# Altium PCB LED plane.PcbDoc
Units mm, origin at the board's own origin, x right, y up, seen from the top; angles counter-clockwise.
Board outline 72 x 72 mm, 2 copper layers (Top Layer, Bottom Layer); 38 components, 37 nets, 79 pads, 0 vias.
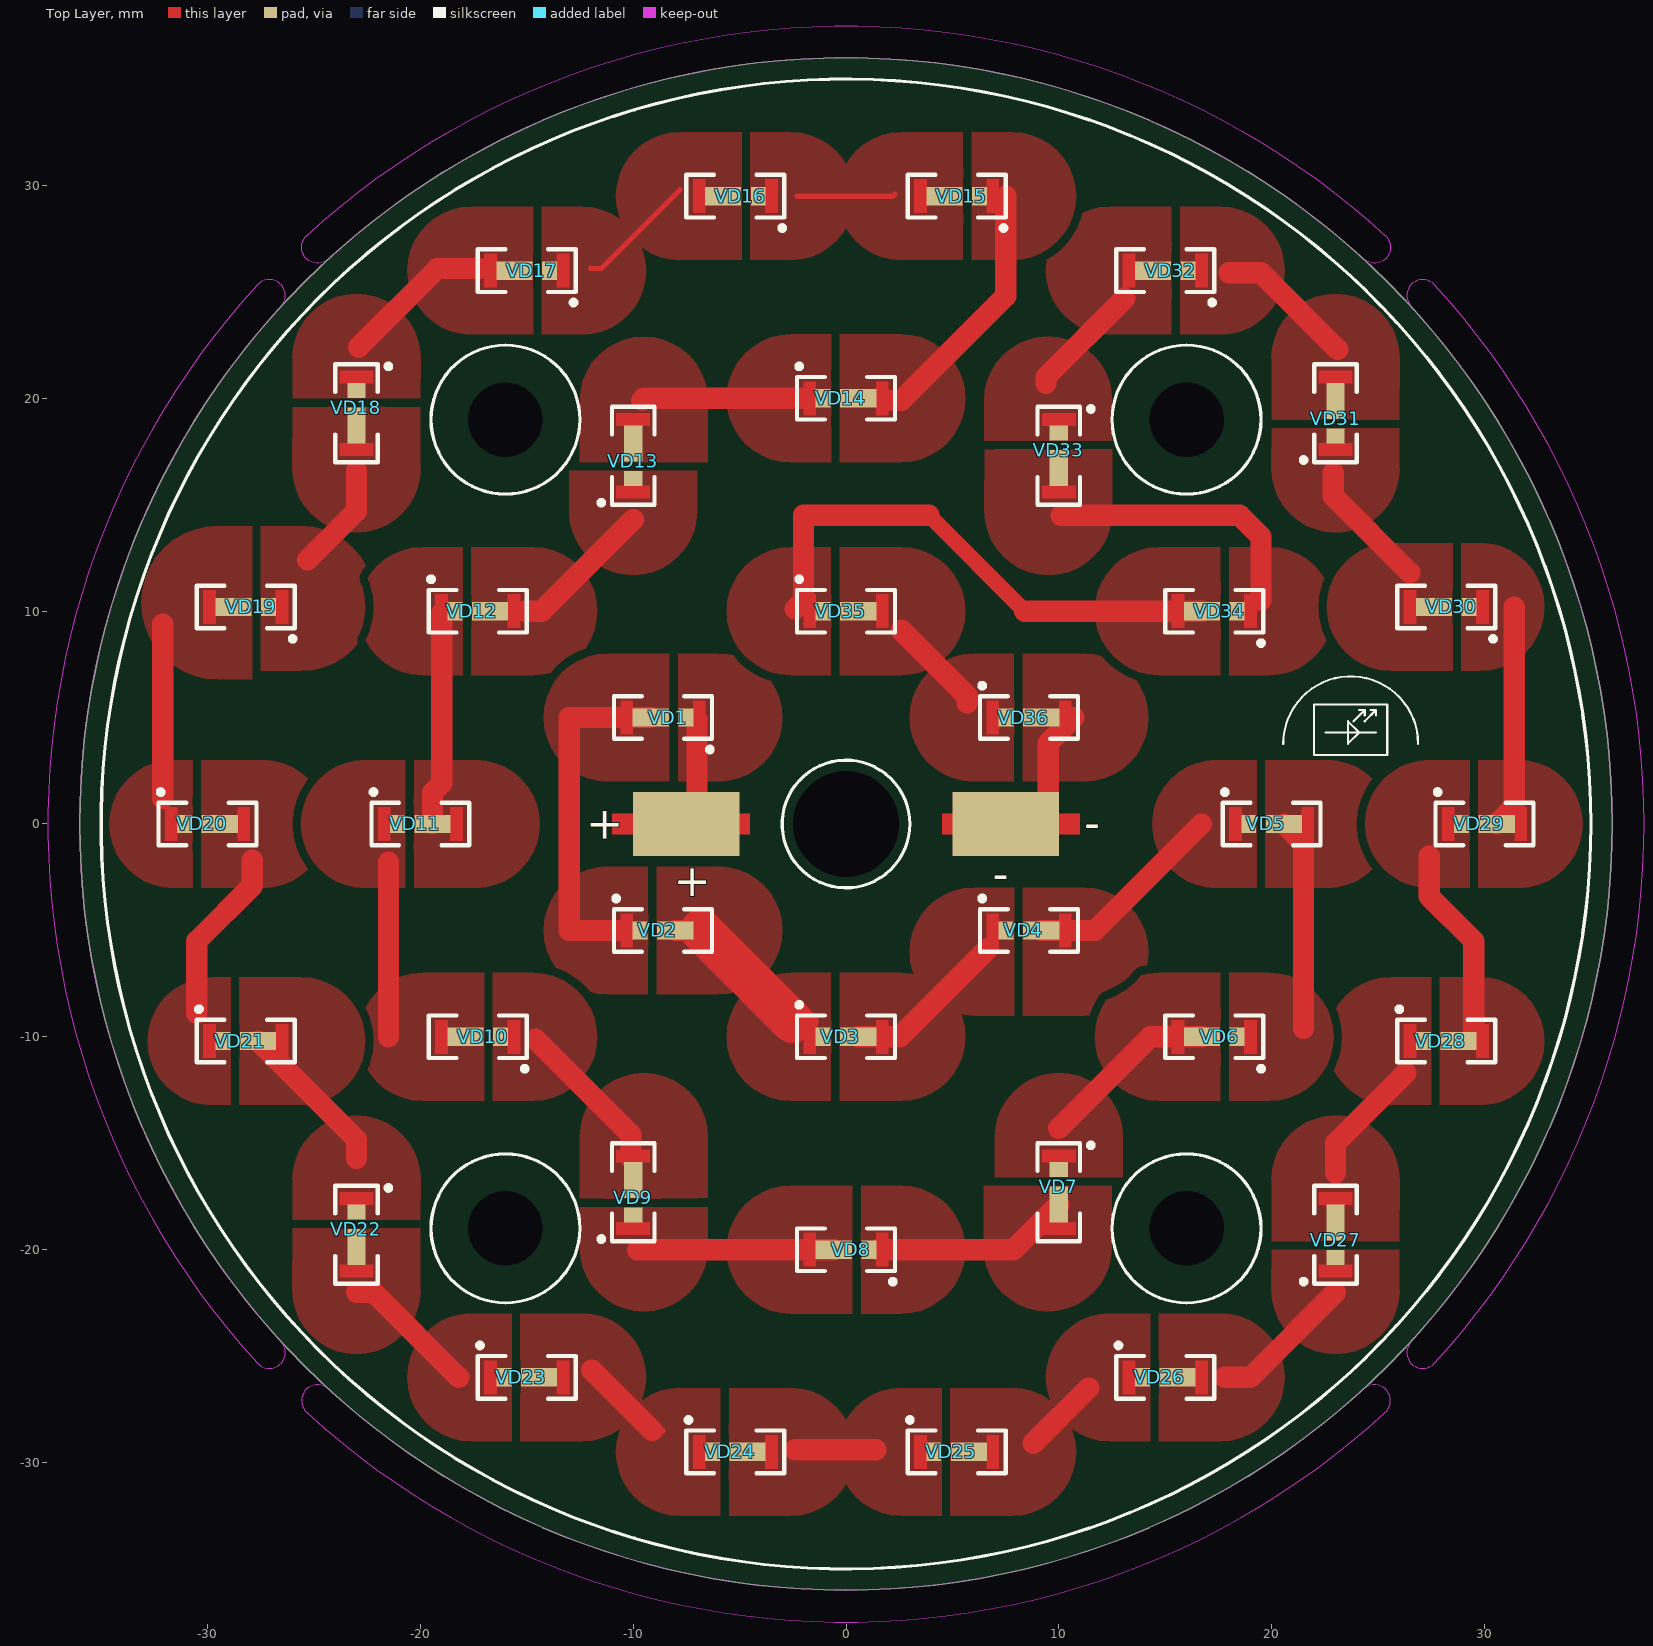
[diagram p0: Top Layer view]
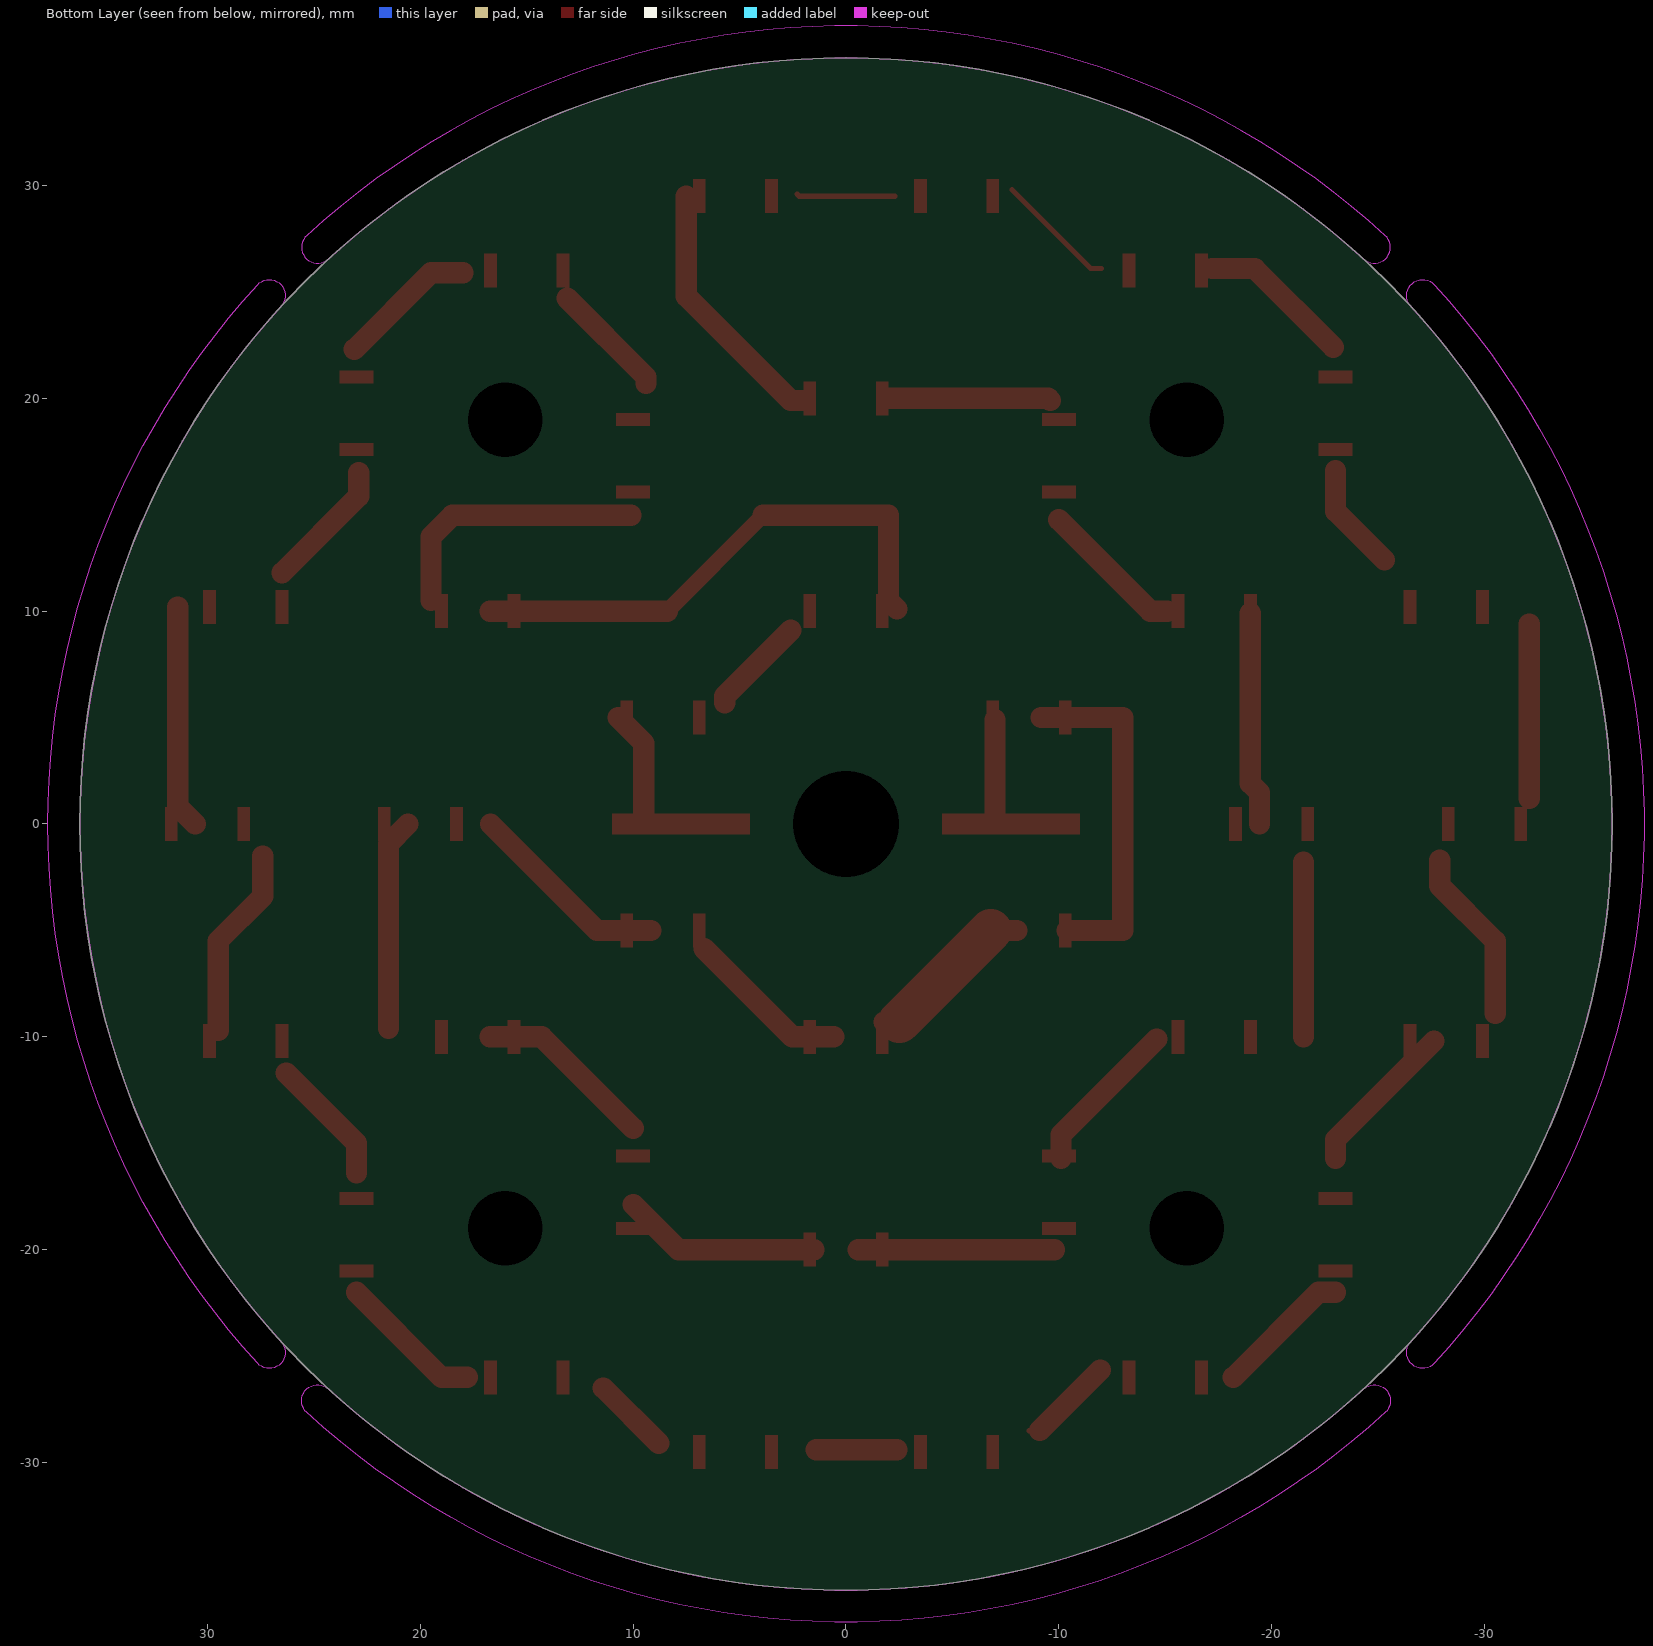
[diagram p1: Bottom Layer view, seen from below]
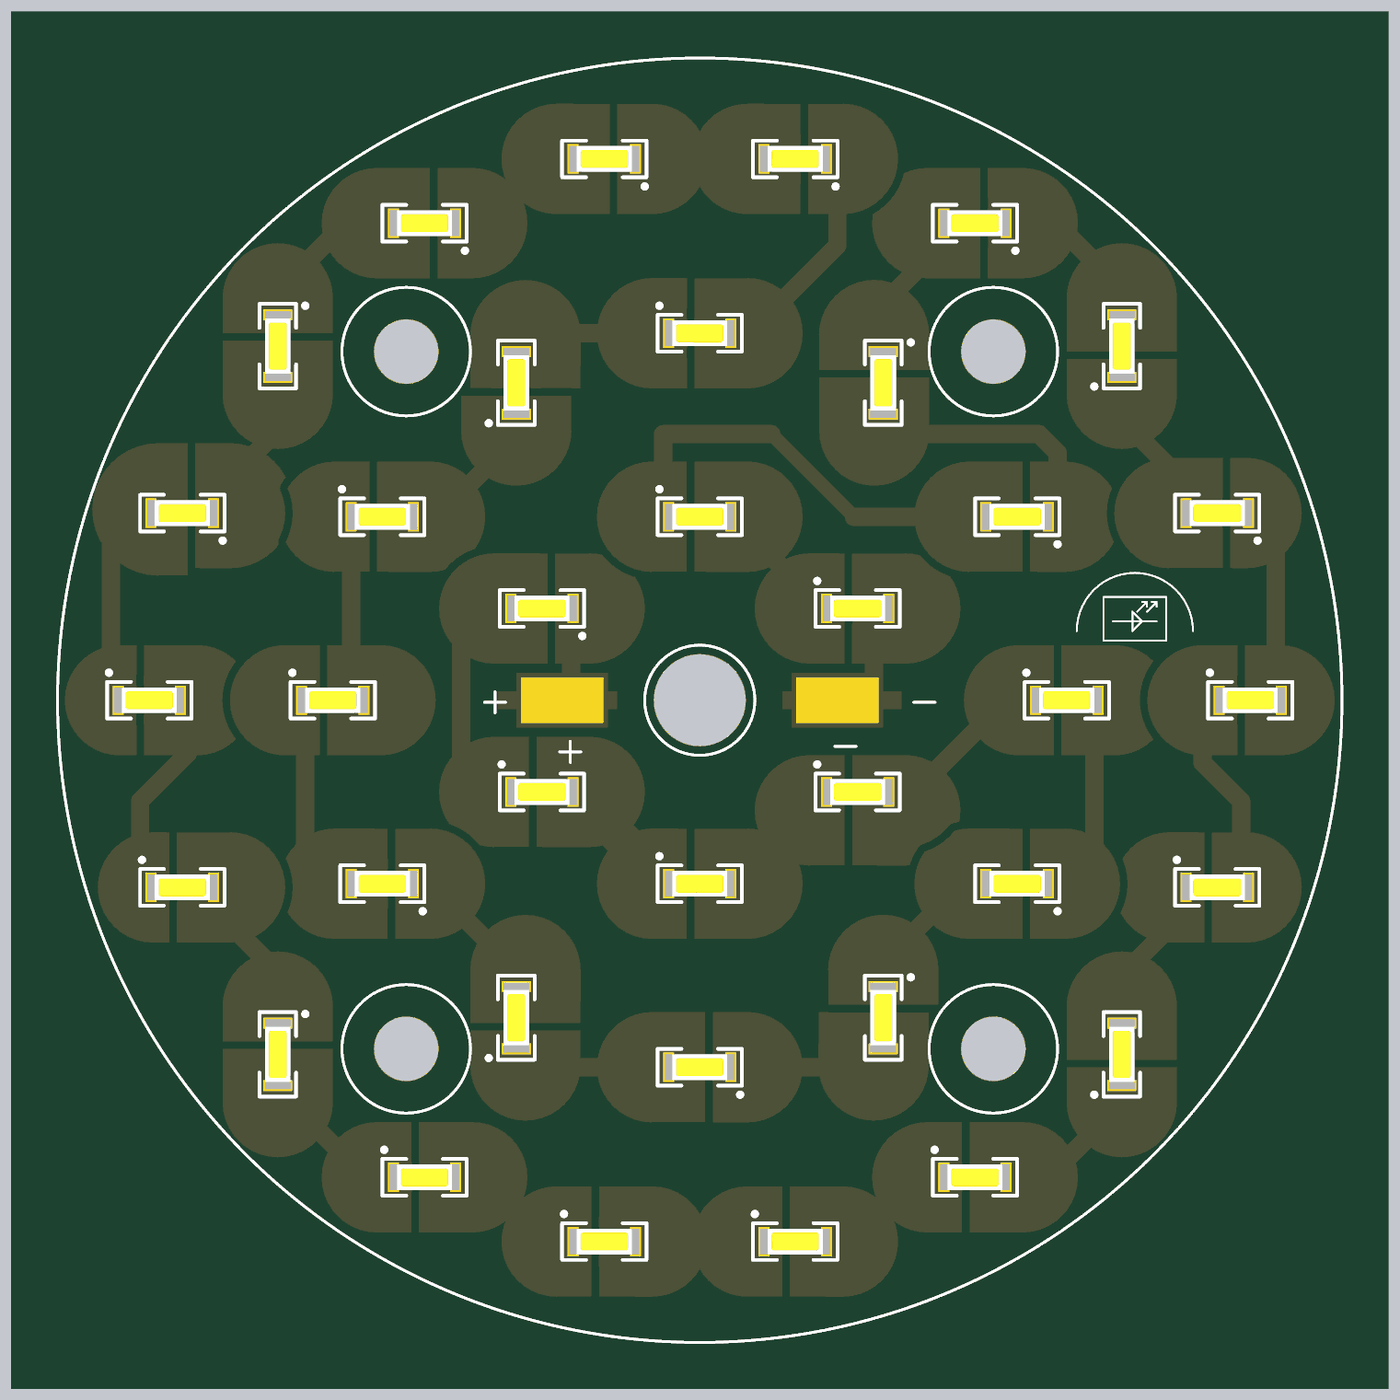
[diagram p2: 3D render of the assembled board from above, using the file's embedded part models]

## Layer stack, top to bottom
Top Layer: signal copper 0.0356
Dielectric: dielectric 0.32, FR-4, Dk 4.8
Bottom Layer: signal copper 0.0356

## Board outline
-36,0 ccw(c0,0) 0,-36 ccw(c0,0) 36,0 ccw(c0,0) 0,36 ccw(c0,0)
cut-out: 26.542,-24.321 ccw(c27.095,-24.828) 27.648,-25.335 ccw(c0,0) 37.5,0 ccw(c0,0) 27.648,25.335 ccw(c27.095,24.828) 26.542,24.321 cw(c0,0) 36,0 cw(c0,0)
cut-out: -24.321,26.542 cw(c-24.828,27.095) -25.335,27.648 cw(c0,0) 25.335,27.648 cw(c24.828,27.095) 25.578,27.095 cw(c24.828,27.095) 24.321,26.542 ccw(c0,0)
cut-out: -27.648,-25.335 ccw(c-27.095,-24.828) -26.345,-24.828 ccw(c-27.095,-24.828) -26.542,-24.321 cw(c0,0) -26.542,24.321 ccw(c-27.095,24.828) -26.345,24.828 ccw(c-27.095,24.828) -27.648,25.335 ccw(c0,0)
cut-out: -25.335,-27.648 ccw(c0,0) 25.335,-27.648 ccw(c24.828,-27.095) 25.578,-27.095 ccw(c24.828,-27.095) 24.321,-26.542 cw(c0,0) -24.321,-26.542 ccw(c-24.828,-27.095)

## Design rules (kind name [scope] priority, off if disabled: settings)
Clearance [All] p1: gap=0.4
HoleSize [All] p1: absolutevalues=TRUE maxlimit=5 minlimit=0.025 maxpercent=80.000 minpercent=20.000
PasteMaskExpansion [All] p1: expansion=0.1
PlaneClearance [All] p1: clearance=1
PlaneConnect [All] p1: planeconnectstyle=Relief reliefexpansion=0.508 reliefentries=4 reliefconductorwidth=1 reliefairgap=0.1
PolygonConnect [All] p1: connectstyle=Direct reliefconductorwidth=0.254 reliefentries=4 polygonreliefangle="90 Angle" airgapwidth=0.254
RoutingVias [All] p1: holewidth=0.711 width=1.27 viastyle="Through Hole" minholewidth=0.711 minwidth=1.27 maxholewidth=0.711 maxwidth=1.27
SilkscreenOverComponentPads SilkToSolderMaskClearance [IsPad] p1: minsilkscreentomaskgap=0.254
SolderMaskExpansion [All] p1: expansion=0.1
Width [All] p1: maxlimit=2 minlimit=0.254 preferedwidth=0.254
23 further rules are at their usual default settings.

## Components (designator, comment, footprint, x,y, rotation, side; value= is the part's Value field where it differs from the comment)
+ "Pad" PAD -7.5,0 r0 top
- "Pad" PAD 7.5,0 r0 top
VD1 "LED" "NICHIA 157" -8.6,5 r180 top
VD2 "LED" "NICHIA 157" -8.6,-5 r0 top
VD3 "LED" "NICHIA 157" 0,-10 r0 top
VD4 "LED" "NICHIA 157" 8.6,-5 r0 top
VD5 "LED" "NICHIA 157" 20,0 r0 top
VD6 "LED" "NICHIA 157" 17.3,-10 r180 top
VD7 "LED" "NICHIA 157" 10,-17.3 r270 top
VD8 "LED" "NICHIA 157" 0,-20 r180 top
VD9 "LED" "NICHIA 157" -10,-17.3 r90 top
VD10 "LED" "NICHIA 157" -17.3,-10 r180 top
VD11 "LED" "NICHIA 157" -20,0 r0 top
VD12 "LED" "NICHIA 157" -17.3,10 r0 top
VD13 "LED" "NICHIA 157" -10,17.3 r90 top
VD14 "LED" "NICHIA 157" 0,20 r0 top
VD15 "LED" "NICHIA 157" 5.2,29.5 r180 top
VD16 "LED" "NICHIA 157" -5.2,29.5 r180 top
VD17 "LED" "NICHIA 157" -15,26 r180 top
VD18 "LED" "NICHIA 157" -23,19.3 r270 top
VD19 "LED" "NICHIA 157" -28.2,10.2 r180 top
VD20 "LED" "NICHIA 157" -30,0 r0 top
VD21 "LED" "NICHIA 157" -28.2,-10.2 r0 top
VD22 "LED" "NICHIA 157" -23,-19.3 r270 top
VD23 "LED" "NICHIA 157" -15,-26 r0 top
VD24 "LED" "NICHIA 157" -5.2,-29.5 r0 top
VD25 "LED" "NICHIA 157" 5.2,-29.5 r0 top
VD26 "LED" "NICHIA 157" 15,-26 r0 top
VD27 "LED" "NICHIA 157" 23,-19.3 r90 top
VD28 "LED" "NICHIA 157" 28.2,-10.2 r0 top
VD29 "LED" "NICHIA 157" 30,0 r0 top
VD30 "LED" "NICHIA 157" 28.2,10.2 r180 top
VD31 "LED" "NICHIA 157" 23,19.3 r90 top
VD32 "LED" "NICHIA 157" 15,26 r180 top
VD33 "LED" "NICHIA 157" 10,17.3 r270 top
VD34 "LED" "NICHIA 157" 17.3,10 r180 top
VD35 "LED" "NICHIA 157" 0,10 r0 top
VD36 "LED" "NICHIA 157" 8.6,5 r0 top

## Footprints (in the part's own frame and the unit in brackets; to place one, negate y for a bottom-side part, rotate by r counter-clockwise, add the part's x,y. Pads: shape width x height; smd on the part's side, far side on the other; paste and mask are expansions set on the pad)
"NICHIA 157" [mm] "SMT LED; 2 Flat Leads"
  rect 0.7x0.86 smd paste-0.1 mask+0.05: 1(-1.075,0)
  rect 1.7x0.86 smd paste-3 mask+0.05: 2(0.575,0)
  Top Layer region: -1.4,0.8 -2,0.8 -2,-0.8 -1.4,-0.8
  Top Layer region: 1.4,-0.8 2,-0.8 2,0.8 1.4,0.8
  silkscreen extent -2.3,-1 2.3,1.6, body extent -1.5,-0.7 1.5,0.7, height 0.5
PAD [mm]
  rect 5x3 smd paste-3 mask-0.25: 1(0,0)

## Part data
+ -: "?X"
VD1 VD2 VD3 VD4 VD5 VD6 VD7 VD8 VD9 VD10 VD11 VD12 VD13 VD14 VD15 VD16 VD17 VD18 VD19 VD20 VD21 VD22 VD23 VD24 VD25 VD26 VD27 VD28 VD29 VD30 VD31 VD32 VD33 VD34 VD35 VD36: "Typical RED, GREEN, YELLOW, AMBER GaAs LED"

## Free pads (board coordinates)
  round 3.2 hole 3.5: 0(-16,-19) 0(-16,19) 0(16,-19) 0(16,19)
  round 4 hole 5: 0(0,0)

## Nets (pads, with @x,y where several pads share a name; then routed paths per layer and width w, separated by ;. In a path a pad name is that pad's centre, name@x,y a point inside that pad or via, vN(x,y) a via of type N, cw(c..) or ccw(c..) an arc to the next point about the centre after c; other vN are vias at no path point)
Net+_1: +.1 VD1.1 | length 4.9
  Top Layer w1: +.1@-7,0 -7,4.475 -7,4.9
Net-_1: -.1 VD36.2 | length 8
  Top Layer w1: -.1@7,0 9.5,0 9.5,3.8 10.7,5
NetVD1_2: VD1.2 VD2.1 | length 16.4
  Top Layer w1: -10.4,-5 -13,-5 -13,5 VD1.2
NetVD2_2: VD2.2 VD3.1 | length 8
  Top Layer w1: VD2.2 -6.8,-5 ; -2.5,-9.3 -1.8,-9.3
  Top Layer w2: -6.8,-5 -2.5,-9.3
NetVD3_2: VD3.2 VD4.1 | length 7.8
  Top Layer w1: VD3.2 2.525,-10 6.663,-5.862
NetVD4_2: VD4.2 VD5.1 | length 9.6
  Top Layer w1: VD4.2 11.7,-5 16.7,0
NetVD5_2: VD5.2 VD6.1 | length 10
  Top Layer w1: VD5.2 21.5,-0.925 21.5,-9.6
NetVD6_2: VD6.2 VD7.1 | length 8.5
  Top Layer w1: 10,-14.3 14.3,-10 VD6.2
NetVD7_2: VD7.2 VD8.1 | length 9.4
  Top Layer w1: 1.5,-20 7.875,-20 VD7.2
NetVD8_2: VD8.2 VD9.1 | length 9.2
  Top Layer w1: -9.8,-20 VD8.2
NetVD9_2: VD9.2 VD10.1 | length 7.5
  Top Layer w1: -14.6,-10.1 -10.1,-14.6 -10.1,-15.7
NetVD10_2: VD10.2 VD11.1 | length 8.2
  Top Layer w1: -21.5,-10 -21.5,-1.8
NetVD11_2: VD11.2 VD12.1 | length 10.1
  Top Layer w1: VD11.2 -19.425,1.475 -19,1.9 -19,9.9
NetVD12_2: VD12.2 VD13.1 | length 6.9
  Top Layer w1: -15.1,10 -14.3,10 -10,14.3
NetVD13_2: VD13.2 VD14.1 | length 7.7
  Top Layer w1: -9.6,19.9 -9.5,20 -1.9,20
NetVD14_2: VD14.2 VD15.1 | length 12.3
  Top Layer w1: 1.9,19.9 2.6,19.9 7.5,24.8 7.5,29.5
NetVD15_2: VD15.2 VD16.1 | length 4.6
  Top Layer w0.254: -2.3,29.5 2.2,29.5 2.3,29.6
NetVD16_2: VD16.2 VD17.1 | length 5.7
  Top Layer w0.254: -12,26.1 -11.5,26.1 -7.8,29.8
NetVD17_2: VD17.2 VD18.1 | length 7.2
  Top Layer w1: -22.9,22.4 -19.2,26.1 -17.2,26.1
NetVD18_2: VD18.2 VD19.1 | length 5.2
  Top Layer w1: -25.3,12.4 -23,14.7 -23,16.6
NetVD19_2: VD19.2 VD20.1 | length 8.2
  Top Layer w1: -32.1,1.2 -32.1,9.4
NetVD20_2: VD20.2 VD21.1 | length 8.3
  Top Layer w1: -30.5,-8.9 -30.5,-5.5 -27.9,-2.9 -27.9,-1.7
NetVD21_2: VD21.2 VD22.1 | length 7.4
  Top Layer w1: VD21.2 -23,-14.825 -23,-15.7
NetVD22_2: VD22.2 VD23.1 | length 6.5
  Top Layer w1: -23,-22 -22.2,-22 -18.2,-26
NetVD23_2: VD23.2 VD24.1 | length 4.5
  Top Layer w0.254: -9.1,-28.5 -8.6,-28.5
  Top Layer w1: -11.95,-25.65 -9.1,-28.5
NetVD24_2: VD24.2 VD25.1 | length 3.9
  Top Layer w0.254: 1.4,-29.4 1.5,-29.3
  Top Layer w1: -2.4,-29.4 1.4,-29.4
NetVD25_2: VD25.2 VD26.1 | length 3.7
  Top Layer w1: 8.8,-29.1 11.4,-26.5
NetVD26_2: VD26.2 VD27.1 | length 6.9
  Top Layer w1: 17.8,-26 19,-26 23,-22
NetVD27_2: VD27.2 VD28.1 | length 6.1
  Top Layer w1: 23,-16.4 23,-15 26.3,-11.7
NetVD28_2: VD28.2 VD29.1 | length 9.1
  Top Layer w1: 27.4,-1.5 27.4,-3.4 29.5,-5.5 29.5,-9.7
NetVD29_2: VD29.2 VD30.1 | length 10.5
  Top Layer w1: VD29.2 31.4,0.825 31.4,10.2
NetVD30_2: VD30.2 VD31.1 | length 6.2
  Top Layer w1: 22.9,16.5 22.9,15.4 26.5,11.8
NetVD31_2: VD31.2 VD32.1 | length 6.6
  Top Layer w1: 18,25.9 19.5,25.9 23.1,22.3
NetVD32_2: VD32.2 VD33.1 | length 5.5
  Top Layer w1: 9.4,20.7 9.4,21 13.1,24.7
NetVD33_2: VD33.2 VD34.1 | length 12.8
  Top Layer w1: 10.1,14.5 18.5,14.5 19.5,13.5 19.5,10.5
NetVD34_2: VD34.2 VD35.1 | length 25.2
  Top Layer w0.75: 3.9,14.5 8.4,10
  Top Layer w1: -2.4,10.1 -2,10.5 -2,14.5 3.9,14.5 ; 8.4,10 VD34.2
NetVD35_2: VD35.2 VD36.1 | length 4.7
  Top Layer w1: 2.6,9.1 5.7,6 5.7,5.7

## Polygon pours and split planes (outlines as drawn)
NetVD23_2 on Top Layer "Top Layer-No Net" (solid, pour order 73): -12.4,-23 -15.3,-23 -15.3,-29 -12.4,-29 ccw(c-12.4,-26)
NetVD26_2 on Top Layer "Top Layer-No Net" (solid, pour order 74): 26,-21.9 26,-20 20,-20 20,-21.9 ccw(c23,-21.9)
NetVD27_2 on Top Layer "Top Layer-No Net" (solid, pour order 75): 20,-16.7 20,-19.6 26,-19.6 26,-16.7 ccw(c23,-16.7)
NetVD8_2 on Top Layer "Top Layer-No Net" (solid, pour order 76): -6.5,-19.9 -6.5,-18 -12.5,-18 -12.5,-19.9 ccw(c-9.5,-19.9)
NetVD9_2 on Top Layer "Top Layer-No Net" (solid, pour order 77): -12.5,-14.708 -12.5,-17.608 -6.5,-17.608 -6.5,-14.708 ccw(c-9.5,-14.708)
NetVD12_2 on Top Layer "Top Layer-No Net" (solid, pour order 78): -7,14.7 -7,16.6 -13,16.6 -13,14.7 ccw(c-10,14.7)
NetVD13_2 on Top Layer "Top Layer-No Net" (solid, pour order 79): -12.5,19.892 -12.5,16.992 -6.5,16.992 -6.5,19.892 ccw(c-9.5,19.892)
NetVD30_2 on Top Layer "Top Layer-No Net" (solid, pour order 80): 26,16.7 26,18.6 20,18.6 20,16.7 ccw(c23,16.7)
NetVD31_2 on Top Layer "Top Layer-No Net" (solid, pour order 81): 20,21.9 20,19 26,19 26,21.9 ccw(c23,21.9)
NetVD31_2 on Top Layer "Top Layer-No Net" (solid, pour order 82): 17.6,29 15.7,29 15.7,23 17.6,23 ccw(c17.6,26)
NetVD32_2 on Top Layer "Top Layer-No Net" (solid, pour order 83): 12.4,23 15.3,23 15.3,29 12.4,29 ccw(c12.4,26)
NetVD13_2 on Top Layer "Top Layer-No Net" (solid, pour order 84): -2.6,17 -0.7,17 -0.7,23 -2.6,23 ccw(c-2.6,20)
NetVD14_2 on Top Layer "Top Layer-No Net" (solid, pour order 85): 2.6,23 -0.3,23 -0.3,17 2.6,17 ccw(c2.6,20)
NetVD34_2 on Top Layer "Top Layer-No Net" (solid, pour order 86): -2.6,7 -0.7,7 -0.7,13 -2.6,13 ccw(c-2.6,10)
NetVD35_2 on Top Layer "Top Layer-No Net" (solid, pour order 87): 2.6,13 -0.3,13 -0.3,7 2.6,7 ccw(c2.6,10)
NetVD11_2 on Top Layer "Top Layer-No Net" (solid, pour order 88): -19.9,7 -18,7 -18,13 -19.9,13 ccw(c-19.9,10)
NetVD12_2 on Top Layer "Top Layer-No Net" (solid, pour order 89): -14.7,13 -17.6,13 -17.6,7 -14.7,7 ccw(c-14.7,10)
NetVD17_2 on Top Layer "Top Layer-No Net" (solid, pour order 90): -26,21.9 -26,20 -20,20 -20,21.9 ccw(c-23,21.9)
NetVD18_2 on Top Layer "Top Layer-No Net" (solid, pour order 91): -20,16.7 -20,19.6 -26,19.6 -26,16.7 ccw(c-23,16.7)
NetVD32_2 on Top Layer "Top Layer-No Net" (solid, pour order 92): 6.5,19.9 6.5,18 12.5,18 12.5,19.9 ccw(c9.5,19.9)
NetVD33_2 on Top Layer "Top Layer-No Net" (solid, pour order 93): 12.515,14.7 12.515,17.6 6.515,17.6 6.515,14.7 ccw(c9.515,14.7)
NetVD6_2 on Top Layer "Top Layer-No Net" (solid, pour order 94): 7,-14.7 7,-16.6 13,-16.6 13,-14.7 ccw(c10,-14.7)
NetVD7_2 on Top Layer "Top Layer-No Net" (solid, pour order 95): 12.477,-19.9 12.477,-17 6.477,-17 6.477,-19.9 ccw(c9.477,-19.9)
NetVD21_2 on Top Layer "Top Layer-No Net" (solid, pour order 96): -26,-16.7 -26,-18.6 -20,-18.6 -20,-16.7 ccw(c-23,-16.7)
NetVD22_2 on Top Layer "Top Layer-No Net" (solid, pour order 97): -20,-21.9 -20,-19 -26,-19 -26,-21.9 ccw(c-23,-21.9)
NetVD20_2 on Top Layer "Top Layer-No Net" (solid, pour order 98): -29.8,-13.2 -28.9,-13.2 -28.9,-7.2 -29.8,-7.2 ccw(c-29.8,-10.2)
NetVD21_2 on Top Layer "Top Layer-No Net" (solid, pour order 99): -25.6,-7.2 -28.5,-7.2 -28.5,-13.2 -25.6,-13.2 ccw(c-25.6,-10.2)
NetVD19_2 on Top Layer "Top Layer-No Net" (solid, pour order 100): -31.6,-3 -30.7,-3 -30.7,3 -31.6,3 ccw(c-31.6,0)
NetVD20_2 on Top Layer "Top Layer-No Net" (solid, pour order 101): -27.4,3 -30.3,3 -30.3,-3 -27.4,-3 ccw(c-27.4,0)
NetVD10_2 on Top Layer "Top Layer-No Net" (solid, pour order 102): -22.6,-3 -20.7,-3 -20.7,3 -22.6,3 ccw(c-22.6,0)
NetVD11_2 on Top Layer "Top Layer-No Net" (solid, pour order 103): -17.4,3 -20.3,3 -20.3,-3 -17.4,-3 ccw(c-17.4,0)
NetVD1_2 on Top Layer "Top Layer-No Net" (solid, pour order 104): -11.2,-8 -9.3,-8 -9.3,-2 -11.2,-2 ccw(c-11.2,-5)
NetVD2_2 on Top Layer "Top Layer-No Net" (solid, pour order 105): -6,-2 -8.9,-2 -8.9,-8 -6,-8 ccw(c-6,-5)
NetVD2_2 on Top Layer "Top Layer-No Net" (solid, pour order 106): -2.6,-13 -0.7,-13 -0.7,-7 -2.6,-7 ccw(c-2.6,-10)
NetVD3_2 on Top Layer "Top Layer-No Net" (solid, pour order 107): 2.6,-7 -0.3,-7 -0.3,-13 2.6,-13 ccw(c2.6,-10)
NetVD35_2 on Top Layer "Top Layer-No Net" (solid, pour order 108): 6,2 7.9,2 7.9,8 6,8 ccw(c6,5)
Net-_1 on Top Layer "Top Layer-No Net" (solid, pour order 109): 11.2,8 8.3,8 8.3,2 11.2,2 ccw(c11.2,5)
NetVD3_2 on Top Layer "Top Layer-No Net" (solid, pour order 110): 6,-9 7.9,-9 7.9,-3 6,-3 ccw(c6,-6)
NetVD4_2 on Top Layer "Top Layer-No Net" (solid, pour order 111): 11.2,-3 8.3,-3 8.3,-9 11.2,-9 ccw(c11.2,-6)
NetVD4_2 on Top Layer "Top Layer-No Net" (solid, pour order 112): 17.4,-3 19.3,-3 19.3,3 17.4,3 ccw(c17.4,0)
NetVD5_2 on Top Layer "Top Layer-No Net" (solid, pour order 113): 22.6,3 19.7,3 19.7,-3 22.6,-3 ccw(c22.6,0)
NetVD28_2 on Top Layer "Top Layer-No Net" (solid, pour order 114): 27.4,-3 29.3,-3 29.3,3 27.4,3 ccw(c27.4,0)
NetVD29_2 on Top Layer "Top Layer-No Net" (solid, pour order 115): 31.6,3 29.7,3 29.7,-3 31.6,-3 ccw(c31.6,0)
NetVD27_2 on Top Layer "Top Layer-No Net" (solid, pour order 116): 25.6,-13.2 27.5,-13.2 27.5,-7.2 25.6,-7.2 ccw(c25.6,-10.2)
NetVD28_2 on Top Layer "Top Layer-No Net" (solid, pour order 117): 29.8,-7.2 27.9,-7.2 27.9,-13.2 29.8,-13.2 ccw(c29.8,-10.2)
NetVD25_2 on Top Layer "Top Layer-No Net" (solid, pour order 118): 12.4,-29 14.3,-29 14.3,-23 12.4,-23 ccw(c12.4,-26)
NetVD26_2 on Top Layer "Top Layer-No Net" (solid, pour order 119): 17.6,-23 14.7,-23 14.7,-29 17.6,-29 ccw(c17.6,-26)
NetVD24_2 on Top Layer "Top Layer-No Net" (solid, pour order 120): 2.6,-32.5 4.5,-32.5 4.5,-26.5 2.6,-26.5 ccw(c2.6,-29.5)
NetVD25_2 on Top Layer "Top Layer-No Net" (solid, pour order 121): 7.8,-26.5 4.9,-26.5 4.9,-32.5 7.8,-32.5 ccw(c7.8,-29.5)
NetVD23_2 on Top Layer "Top Layer-No Net" (solid, pour order 122): -7.8,-32.5 -5.9,-32.5 -5.9,-26.5 -7.8,-26.5 ccw(c-7.8,-29.5)
NetVD24_2 on Top Layer "Top Layer-No Net" (solid, pour order 123): -2.6,-26.5 -5.5,-26.5 -5.5,-32.5 -2.6,-32.5 ccw(c-2.6,-29.5)
NetVD22_2 on Top Layer "Top Layer-No Net" (solid, pour order 124): -17.6,-29 -15.7,-29 -15.7,-23 -17.6,-23 ccw(c-17.6,-26)
NetVD9_2 on Top Layer "Top Layer-No Net" (solid, pour order 125): -14.7,-7 -16.6,-7 -16.6,-13 -14.7,-13 ccw(c-14.7,-10)
NetVD10_2 on Top Layer "Top Layer-No Net" (solid, pour order 126): -19.9,-13 -17,-13 -17,-7 -19.9,-7 ccw(c-19.9,-10)
NetVD18_2 on Top Layer "Top Layer-No Net" (solid, pour order 127): -25.6,14 -27.5,14 -27.5,7.2 -25.6,7.2 ccw(c-25.6,10.6)
NetVD19_2 on Top Layer "Top Layer-No Net" (solid, pour order 128): -29.5,6.8 -27.9,6.8 -27.9,14 -29.5,14 ccw(c-29.5,10.4)
NetVD16_2 on Top Layer "Top Layer-No Net" (solid, pour order 129): -12.4,29 -14.3,29 -14.3,23 -12.4,23 ccw(c-12.4,26)
NetVD17_2 on Top Layer "Top Layer-No Net" (solid, pour order 130): -17.6,23 -14.7,23 -14.7,29 -17.6,29 ccw(c-17.6,26)
NetVD14_2 on Top Layer "Top Layer-No Net" (solid, pour order 131): 7.8,32.5 5.9,32.5 5.9,26.5 7.8,26.5 ccw(c7.8,29.5)
NetVD15_2 on Top Layer "Top Layer-No Net" (solid, pour order 132): 2.6,26.5 5.5,26.5 5.5,32.5 2.6,32.5 ccw(c2.6,29.5)
NetVD15_2 on Top Layer "Top Layer-No Net" (solid, pour order 133): -2.6,32.5 -4.5,32.5 -4.5,26.5 -2.6,26.5 ccw(c-2.6,29.5)
NetVD16_2 on Top Layer "Top Layer-No Net" (solid, pour order 134): -7.8,26.5 -4.9,26.5 -4.9,32.5 -7.8,32.5 ccw(c-7.8,29.5)
NetVD29_2 on Top Layer "Top Layer-No Net" (solid, pour order 135): 29.8,13.2 28.9,13.2 28.9,7.2 29.8,7.2 ccw(c29.8,10.2)
NetVD30_2 on Top Layer "Top Layer-No Net" (solid, pour order 136): 25.6,7.2 28.5,7.2 28.5,13.2 25.6,13.2 ccw(c25.6,10.2)
NetVD33_2 on Top Layer "Top Layer-No Net" (solid, pour order 137): 19.9,13 18,13 18,7 19.9,7 ccw(c19.9,10)
NetVD34_2 on Top Layer "Top Layer-No Net" (solid, pour order 138): 14.7,7 17.6,7 17.6,13 14.7,13 ccw(c14.7,10)
NetVD5_2 on Top Layer "Top Layer-No Net" (solid, pour order 139): 19.9,-7 18,-7 18,-13 19.9,-13 ccw(c19.9,-10)
NetVD6_2 on Top Layer "Top Layer-No Net" (solid, pour order 140): 14.7,-13 17.6,-13 17.6,-7 14.7,-7 ccw(c14.7,-10)
NetVD7_2 on Top Layer "Top Layer-No Net" (solid, pour order 141): 2.6,-17 0.7,-17 0.7,-23 2.6,-23 ccw(c2.6,-20)
NetVD8_2 on Top Layer "Top Layer-No Net" (solid, pour order 142): -2.6,-23 0.3,-23 0.3,-17 -2.6,-17 ccw(c-2.6,-20)
NetVD1_2 on Top Layer "Top Layer-No Net" (solid, pour order 143): -11.2,2 -8.3,2 -8.3,8 -11.2,8 ccw(c-11.2,5)
Net+_1 on Top Layer "Top Layer-No Net" (solid, pour order 144): -6,8 -7.9,8 -7.9,2 -6,2 ccw(c-6,5)

## Other copper
Top Layer:
  rectangle net Net-_1: 4.5,-0.5 11,0.5
  rectangle net Net+_1: -11,-0.5 -4.5,0.5

## Silkscreen, mask and mechanical layers (free items; w line width, h text height)
Top Overlay:
  circle w0.15: c16,19 r3.5
  circle w0.15: c16,-19 r3.5
  circle w0.15: c-16,-19 r3.5
  circle w0.15: c-16,19 r3.5
  circle w0.15: c0,0 r35
  circle w0.15: c0,0 r3
  lines w0.1: 20.546,3.772 cw(c23.712,3.772) 26.879,3.772 ; 22.525,4.3 24.9,4.3 ; 23.844,4.828 24.372,5.356 ; 24.108,5.356 24.372,5.356 ; 24.372,4.828 24.9,5.356 ; 24.372,5.092 24.372,5.356 ; 24.636,5.356 24.9,5.356 ; 24.9,5.092 24.9,5.356 ; 21.997,3.244 25.428,3.244 25.428,5.62 21.997,5.62 21.997,4.036 21.997,3.244 ; 23.58,3.772 23.58,4.3 23.58,4.828 24.108,4.3 23.58,3.772
  text "+" at -12.2,-0.7 h1.52
  text "-" at 11.2,-0.7 h1.52
Mechanical 1:
  lines w1.5: -27.095,-24.828 cw(c0,0) -27.095,24.828 ; -24.828,-27.095 ccw(c0,0) 24.828,-27.095 ; -24.828,27.095 cw(c0,0) 24.828,27.095 ; 27.095,-24.828 ccw(c0,0) 27.095,24.828